# Altium PCB 2019_ESP01_Prog.PcbDoc
Units mil, origin at the board's own origin, x right, y up, seen from the top; angles counter-clockwise.
Board outline 990 x 1775 mil, 4 copper layers (1-TOP, 2-SIGNAL, 3-GND, 4-BOT), stack 68 mil thick; 35 components, 27 nets, 118 pads, 33 vias.
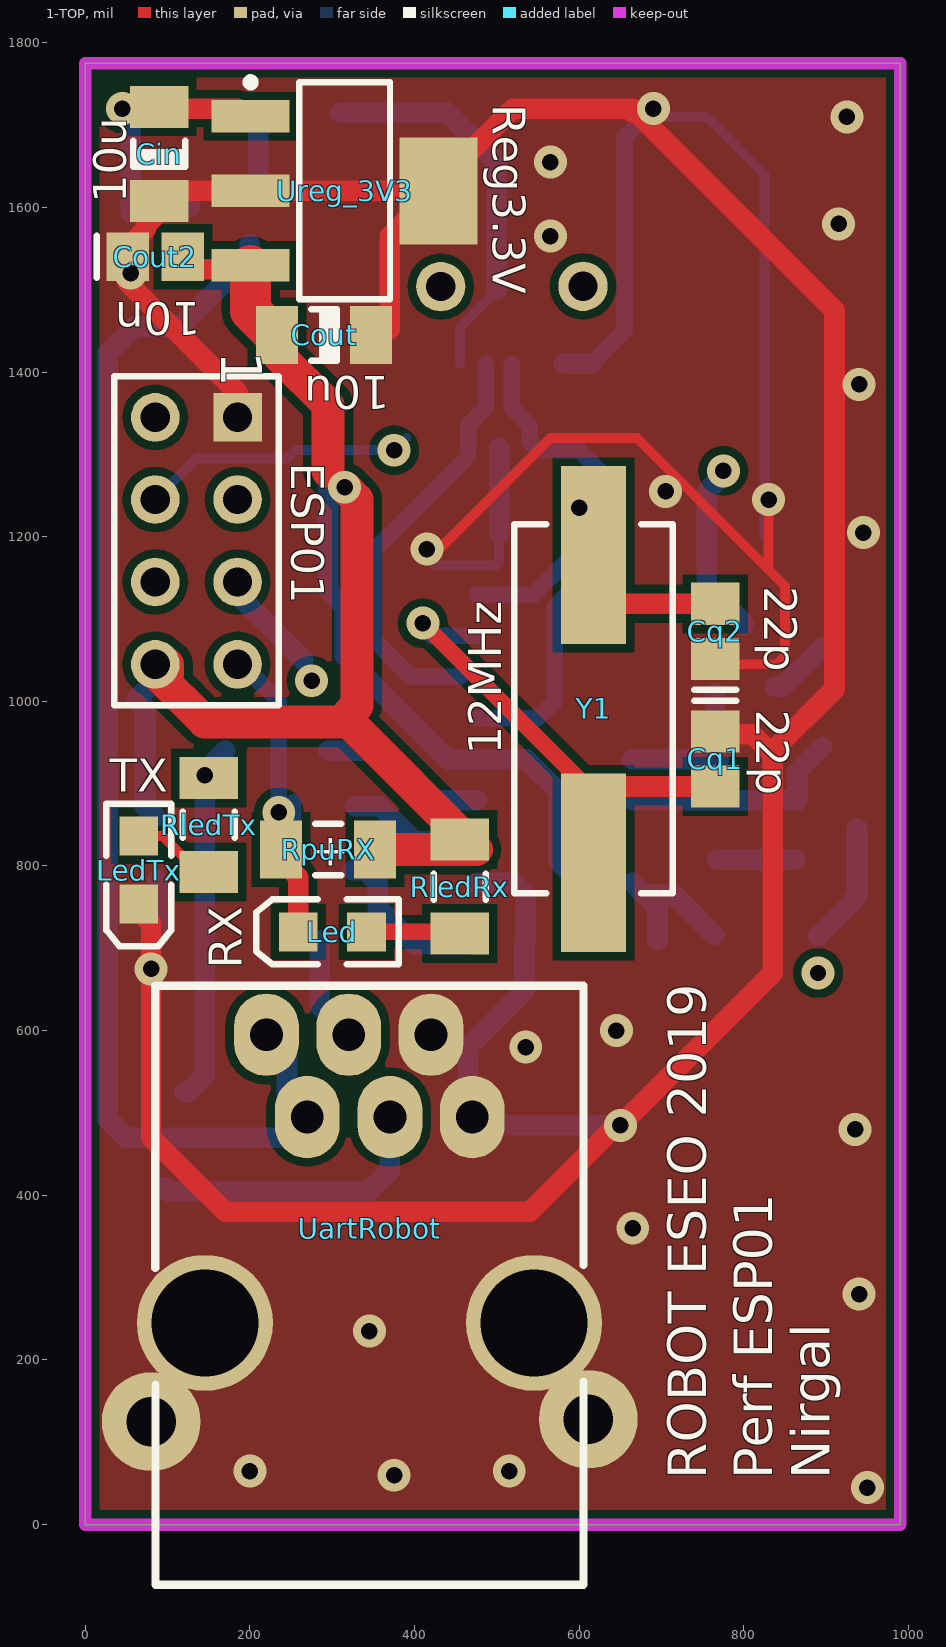
[diagram p0: 1-TOP view]
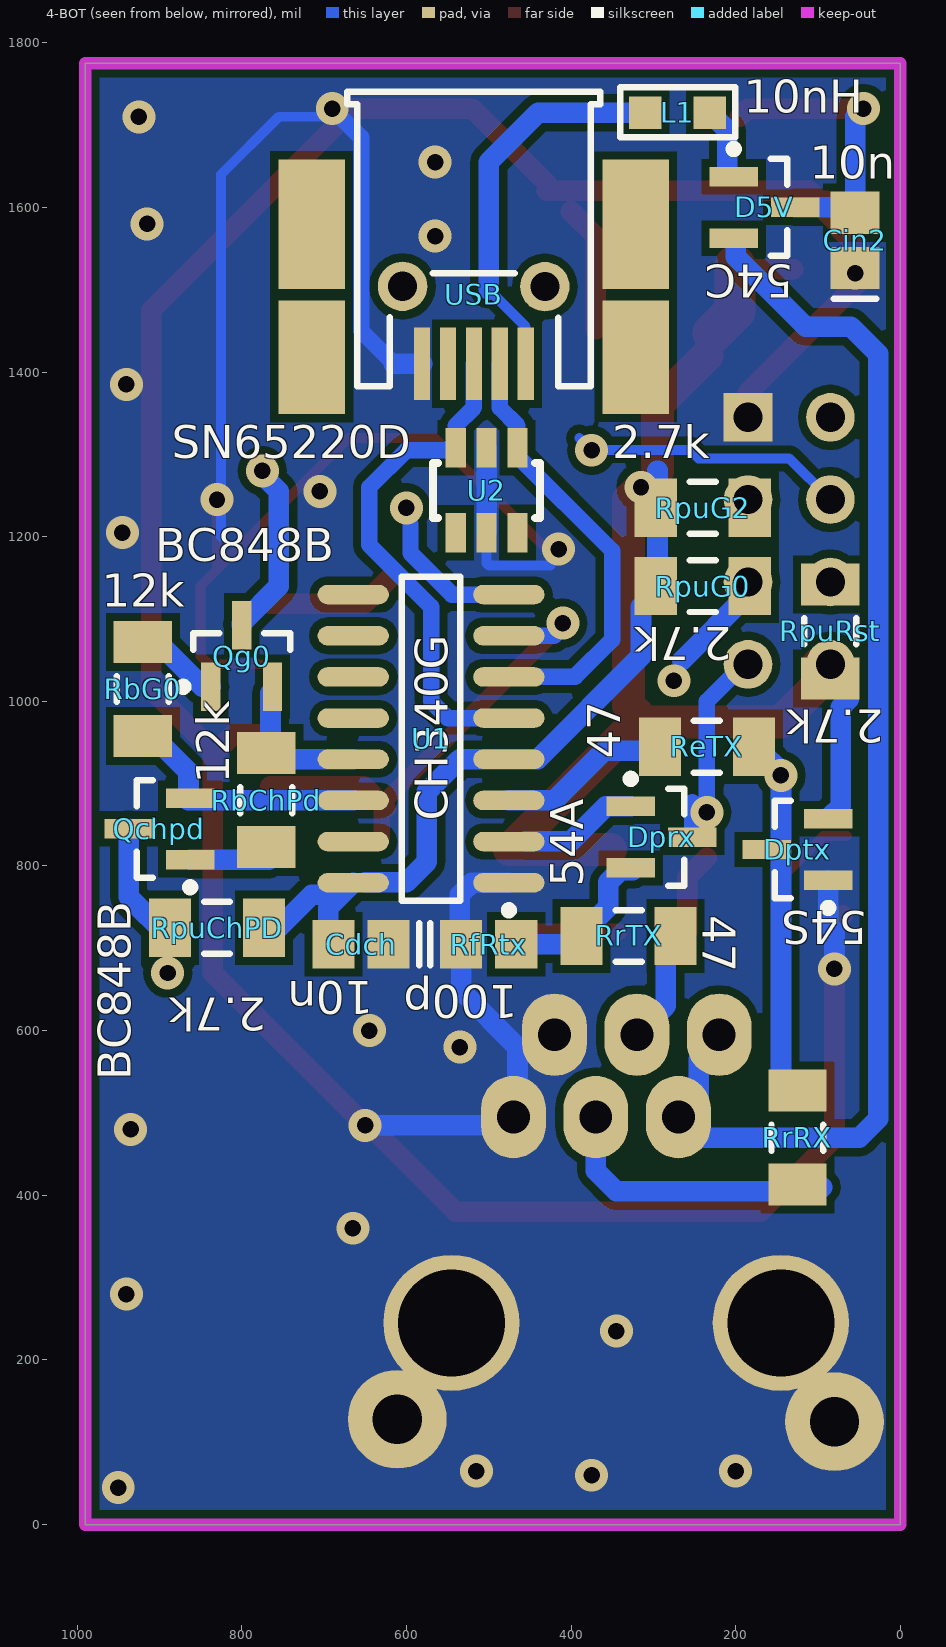
[diagram p1: 4-BOT view, seen from below]
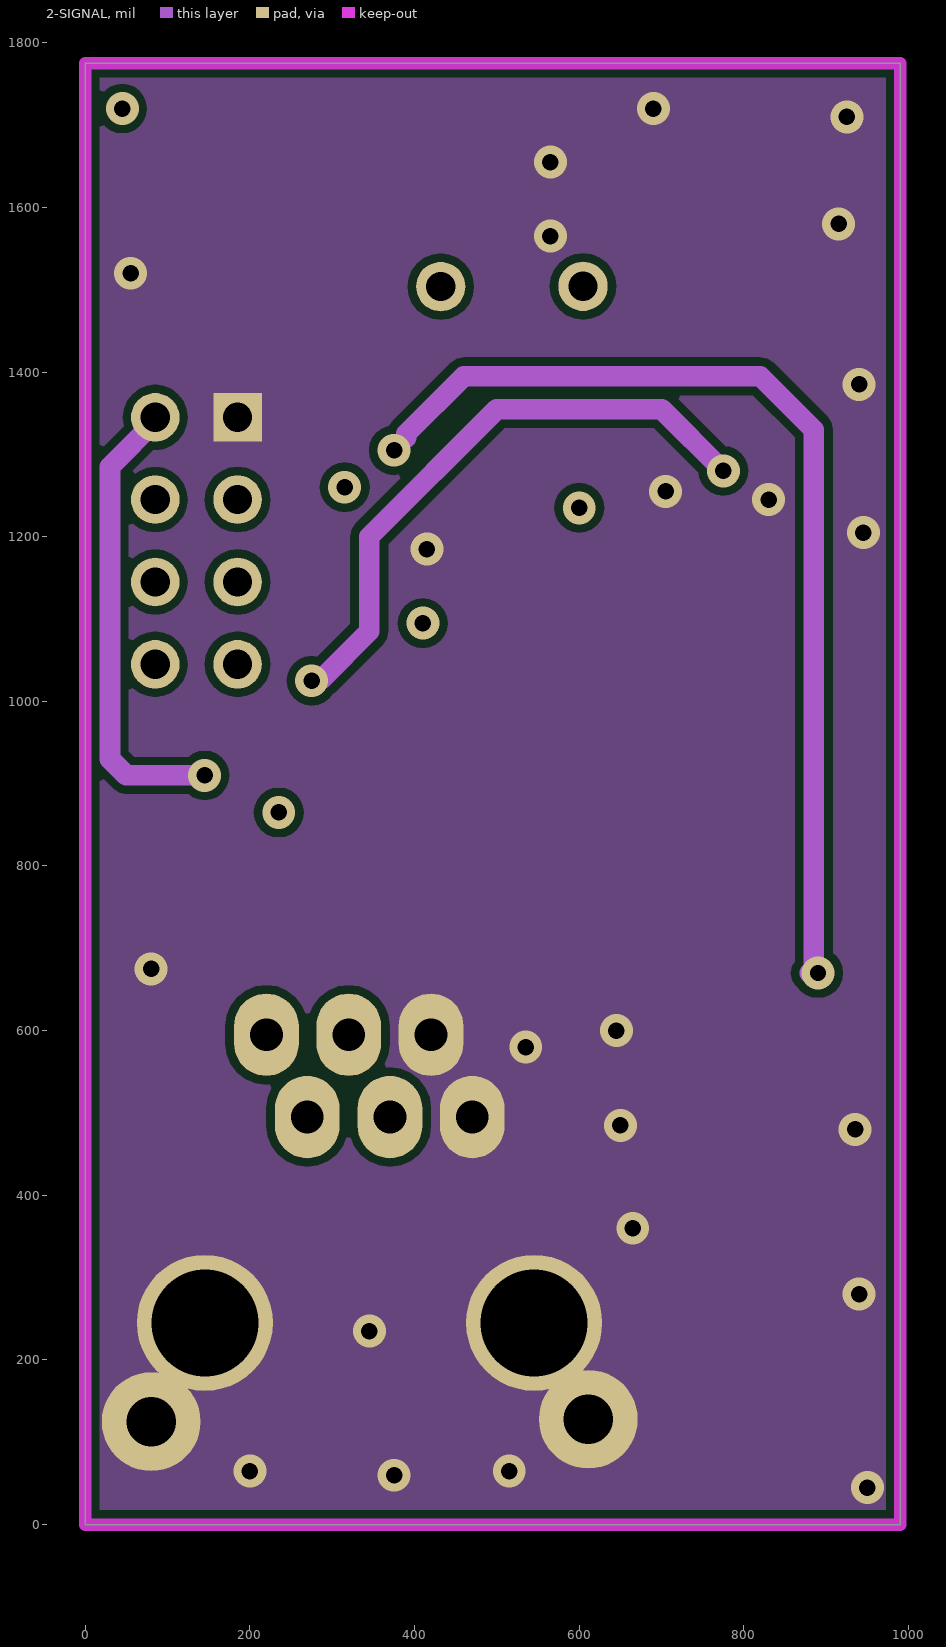
[diagram p2: 2-SIGNAL]
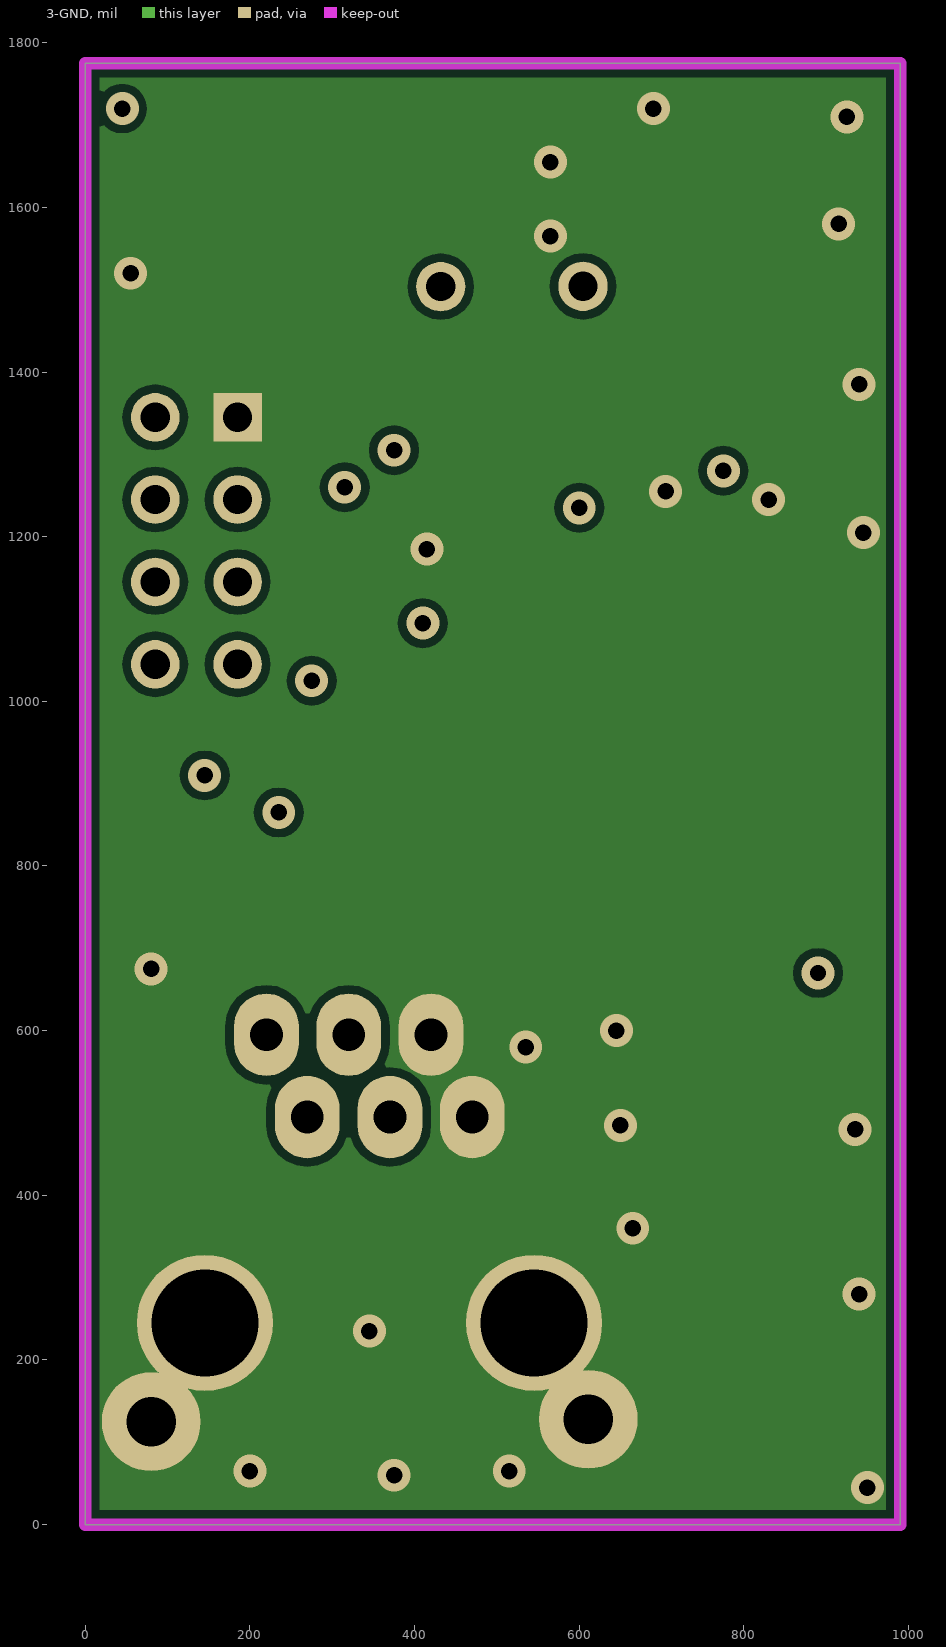
[diagram p3: 3-GND]
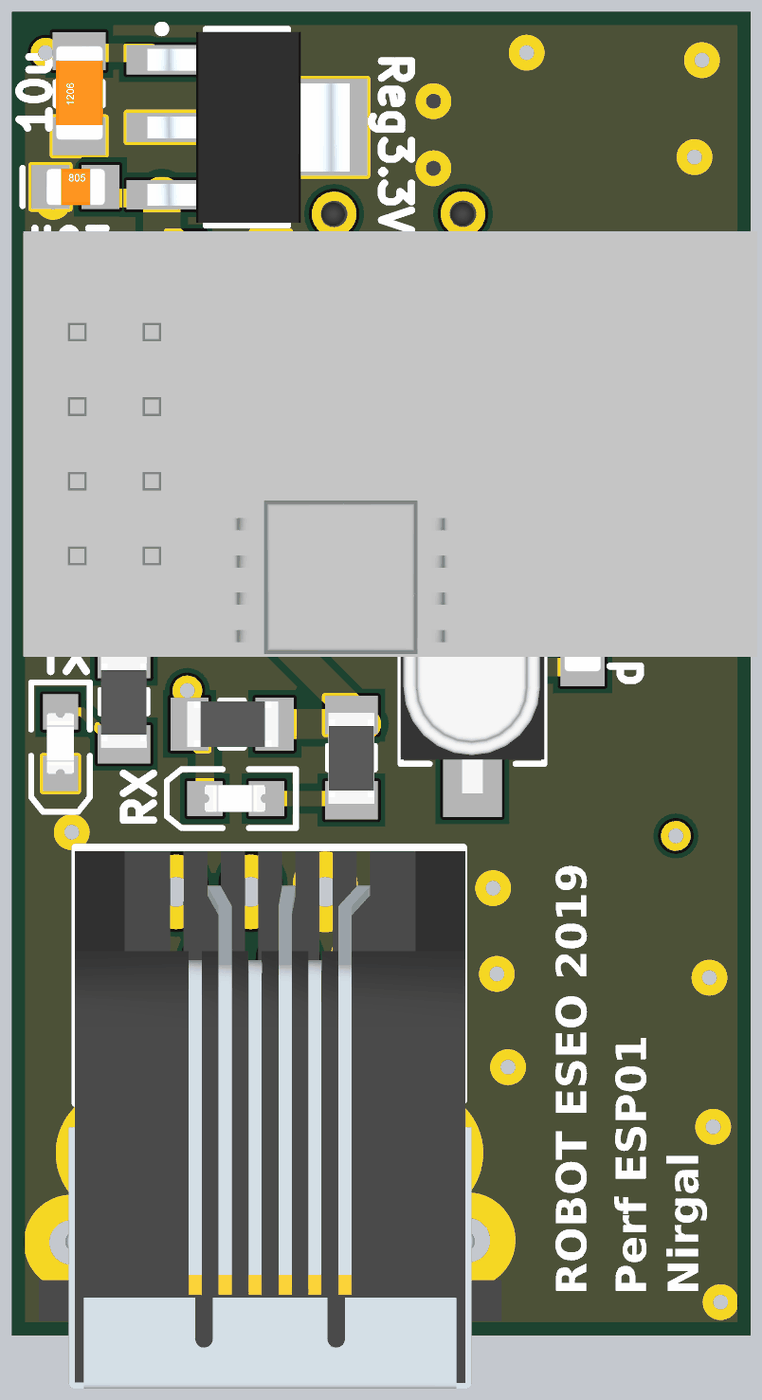
[diagram p4: 3D render of the assembled board from above, using the file's embedded part models]
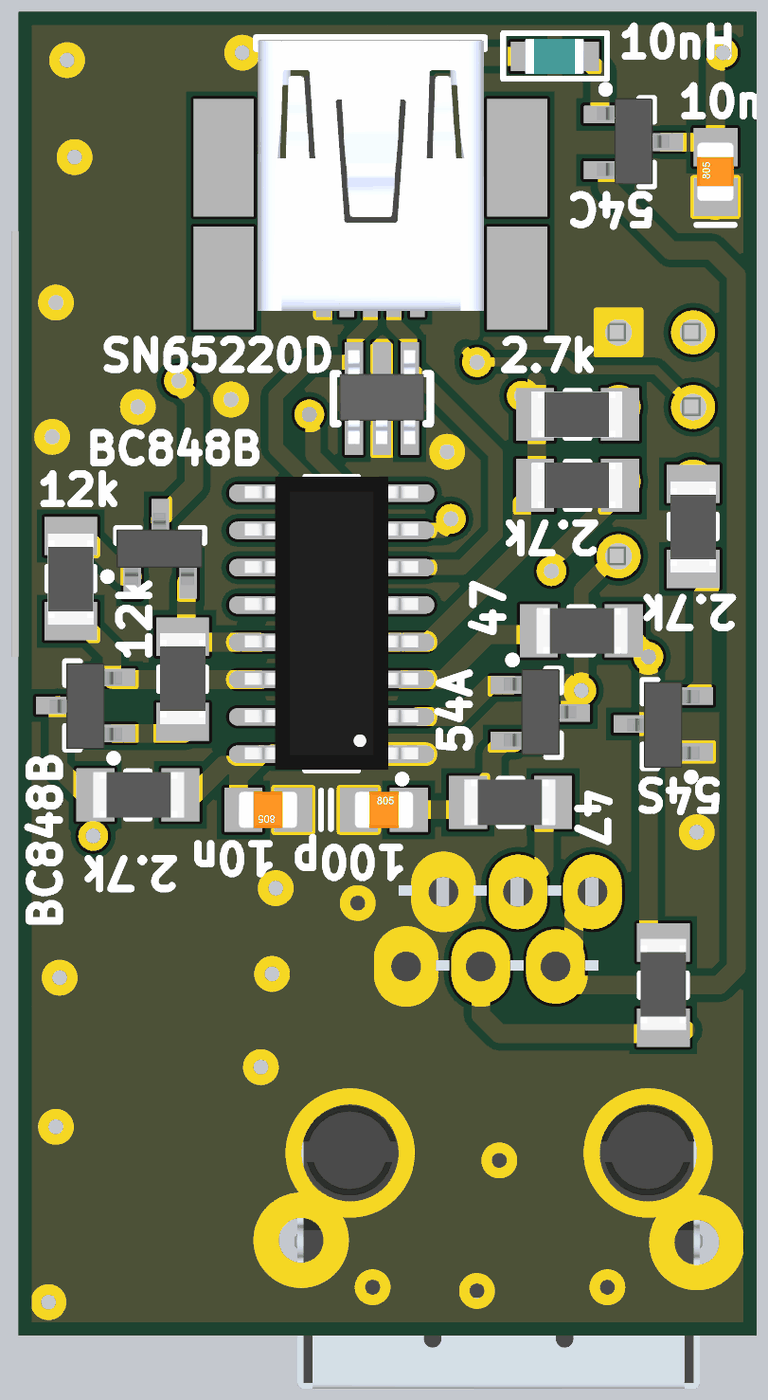
[diagram p5: 3D render of the assembled board from below, using the file's embedded part models]

## Layer stack, top to bottom
Top Solder: solder mask 0.4, Solder Resist, Dk 3.5
1-TOP: signal copper 1.4
Dielectric1: core 20.8, FR-4, Dk 4.8
2-SIGNAL: signal copper 1.4
Dielectric2: prepreg 20.8, FR-4, Dk 4.8
3-GND: signal copper 1.4
Dielectric3: core 20.8, FR-4, Dk 4.8
4-BOT: signal copper 1.4
Bottom Solder: solder mask 0.4, Solder Resist, Dk 3.5

## Board outline
0,0 0,1775 990,1775 990,0

## Design rules (kind name [scope] priority, off if disabled: settings)
Clearance Clearance_1 [InNamedPolygon('2-GND') Or  InNamedPolygon('3-GND') Or  InNamedPolygon('1-GND') Or  InNamedPolygon('4-GND')] p1: gap=10 ignorepadtopadclearanceinfootprint=FALSE except(0: Arc-Hole Track-Hole SMDPad-Hole THPad-Hole Via-Hole Fill-Hole Poly-Hole Region-Hole Text-Hole)
Clearance [All] p2: gap=7 ignorepadtopadclearanceinfootprint=FALSE except(0: Arc-Hole Track-Hole SMDPad-Hole THPad-Hole Via-Hole Fill-Hole Poly-Hole Region-Hole Text-Hole)
FabricationTestpoint [(IsPad And (OnTopLayer Or OnBottomLayer))] p1: side=3 testpointundercomponent=TRUE minsize=40 maxsize=100 preferedsize=60 minholesize=0 maxholesize=40 preferedholesize=32 testpointgrid=1 allowsidetop=TRUE allowsidebottom=TRUE usegrid=TRUE gridtolerance=0.01
HoleSize [All] p1: absolutevalues=TRUE maxlimit=200 minlimit=1 maxpercent=80.000 minpercent=20.000
PlaneConnect [All] p1: planeconnectstyle=Direct reliefexpansion=20 reliefentries=4 reliefconductorwidth=10 reliefairgap=10
PolygonConnect [All] p1: connectstyle=Direct reliefconductorwidth=10 reliefentries=4 polygonreliefangle="90 Angle" airgapwidth=10
RoomDefinition 2019_ESP01_Prog [InComponentClass('2019_ESP01_Prog')] p1: confinementstyle=ConfineIn formatcopy=TRUE lockcomponents=FALSE outline 2635,-960 2490,-960 2490,-755 2635,-755
RoutingVias [All] p1: holewidth=28 width=50 viastyle="Through Hole" minholewidth=28 minwidth=50 maxholewidth=28 maxwidth=50
SilkToSolderMaskClearance SilkscreenOverComponentPads [IsPad] p1: minsilkscreentomaskgap=10 clearancetoexposedcopper=TRUE
SolderMaskExpansion [All] p1: expansion=4
Width [All] p1: maxlimit=200 minlimit=10 preferedwidth=15
26 further rules are at their usual default settings.

## Components (designator, comment, footprint, x,y, rotation, side; value= is the part's Value field where it differs from the comment)
Cdch "10nF" C0805_N 655,705 r0 bottom
Cin "10uF" C1206_N 90,1665 r90 top
Cin2 "10nF" C0805_N 55,1560 r90 bottom
Cout "10uF" C1206_N 290,1445 r180 top
Cout2 "10nF" C0805_N 85,1540 r0 top
Cq1 "22pF" C0805_N 765,930 r270 top
Cq2 "22pF" C0805_N 765,1085 r90 top
D5V "BAT54C" SOT23-3N 165,1600 r180 bottom
Dprx "BAT54A" SOT23-3N 290,835 r180 bottom
Dptx "BAT54S" SOT23-3N 125,820 r0 bottom
ESP01 "BARRETTE_4 CONTACTS_2 RANGEES_FEMELLE_DROITE" ESP01 85,1345 r270 top
L1 "INDUCTANCE_PERLE_DE_FERRITE_0603" INDUCTANCE_CMS_0603 310,1715 r180 bottom
Led "Rx" LED_0805 300,720 r180 top
LedTx "Tx" LED_0805 65,795 r270 top
Qchpd "BC848B" SOT23-3N 900,845 r0 bottom
Qg0 "BC848B" SOT23-3N 800,1055 r90 bottom
RbChPd "12k" R1206_N 770,880 r90 bottom
RbG0 "12k" R1206_N 920,1015 r270 bottom
ReTX "47" R1206_N 235,945 r180 bottom
RfRtx "100pF" C0805_N 500,705 r180 bottom
RledRx "330" R1206_N 455,775 r270 top
RledTx "100" R1206_N 150,850 r270 top
RpuChPD "2.7k" R1206_N 830,725 r180 bottom
RpuG0 "2.7k" R1206_N 240,1140 r0 bottom
RpuG2 "2.7k" R1206_N 240,1235 r0 bottom
RpuRst "2.7k" R1206_N 85,1085 r270 bottom
RpuRX "10k" R1206_N 295,820 r0 top
RrRX "47" R1206_N 125,470 r90 bottom
RrTX "47" R1206_N 330,715 r0 bottom
U1 "CH340G" SO16_N 570,954.65 r0 bottom
U2 "SN65220D" SOT26_PAS=0.95_LARG=3_LONG=3 540,1205 r180 bottom
UartRobot "RJ11_6/6" "RJ11_6/6 - Wurth Half Shielded Tab Down WR-MJ" 420,595 r270 top
Ureg_3V3 "MCP1826S-3302E/DB" SOT223-4N 315,1620 r0 top
USB "USB_B_CMS" USB_MINI_B 455,1410 r0 bottom
Y1 "QUARTZ_CMS_HC49/4S" QUARTZ_CMS_HC49/4S 635,865 r90 top

## Footprints (in the part's own frame and the unit in brackets; to place one, negate y for a bottom-side part, rotate by r counter-clockwise, add the part's x,y. Pads: shape width x height; smd on the part's side, far side on the other; paste and mask are expansions set on the pad)
C0805_N [mm] "Chip Capacitor, Body 2.0x1.3mm, IPC Medium Density"
  rect 1.3x1.5 smd: 1(-0.85,0) 2(0.85,0)
  silkscreen extent -1.8,-0.65 -1.8,0.65, body extent -0.99,-0.63 1.01,0.62, height 0.8
C1206_N [mm] "Chip Capacitor, Body 3.2x1.6mm, IPC Medium Density"
  rect 1.3x1.8 smd: 1(-1.45,0) 2(1.45,0)
  silkscreen extent -0.4,-0.8 0.4,0.8, body extent -1.57,-0.81 1.63,0.79, height 1.02
ESP01 [mm]
  rect 1.5x1.5 hole 0.9: 1(0,2.54)
  round 1.5 hole 0.9: 2(0,0) 3(2.54,2.54) 4(2.54,0) 5(5.08,2.54) 6(5.08,0) 7(7.62,2.54) 8(7.62,0)
  silkscreen extent -1.27,-1.27 8.89,3.81, body extent -3.45,-1.78 11.05,23.22, height 9.65
INDUCTANCE_CMS_0603 [mm] "INDUCTANCE CMS 0603 ; DIMENSIONS : 1.6mm x 0.8mm"
  rect 1x1 smd: 1(0,0) 2(2,0)
  silkscreen extent -0.76,-0.76 2.78,0.79, body extent -0.01,-0.6 1.99,0.6, height 0.95
LED_0805 [mm] "SM LED; 2 Flat Leads"
  rect 1.2x1.2 smd: 1(-1.05,0) 2(1.05,0)
  silkscreen extent -2.05,-1 2.35,1, body extent -1.05,-0.64 1.06,0.64, height 1.2
QUARTZ_CMS_HC49/4S [mil] "QUARTZ CMS HC49 ;  DIMENSIONS : 11.4mm x 4.9mm ; ESPACEMENT BROCHES : 9.5mm"
  rect 216.53x78.73 smd: 1(-61.2,17.6) 2(312.8,17.6)
  silkscreen extent -98,-79 350,114, body extent -138,-79 390,114, height 200
R1206_N [mm] "Chip Resistor, Body 3.2x1.6mm, IPC Medium Density"
  rect 1.3x1.8 smd: 1(-1.45,0) 2(1.45,0)
  silkscreen extent -0.4,-0.8 0.4,0.8, body extent -1.68,-0.87 1.68,0.87, height 0.71
"RJ11_6/6 - Wurth Half Shielded Tab Down WR-MJ" [mil] "Connector; RJ11; 6P/6C; 615 006 143 421"
  oval 100x78.74 hole 40: 1(0,-200) 2(100,-150.39) 3(0,-100) 4(100,-50) 5(0,0) 6(100,50)
  round 165.35 hole 130: 5(350,125.2) 5(350,-274.8)
  round 120 hole 60: 5(467,191) 5(470,-340)
  silkscreen extent -59,-335 668,185, body extent -54,-384 666,236, height 510
SO16_N [mm] "16-Pin Small Outline Integrated Circuit 1.27 mm Pitch, IPC Medium Density"
  oval 2.2x0.6 smd: 1(-2.4,4.445) 2(-2.4,3.175) 3(-2.4,1.905) 4(-2.4,0.635) 5(-2.4,-0.635) 6(-2.4,-1.905) 7(-2.4,-3.175) 8(-2.4,-4.445) 9(2.4,-4.445) 10(2.4,-3.175) 11(2.4,-1.905) 12(2.4,-0.635) 13(2.4,0.635) 14(2.4,1.905) 15(2.4,3.175) 16(2.4,4.445)
  silkscreen extent -2.52,-5 0.9,5.42, body extent -2.95,-5 2.95,4.98, height 1.75
SOT23-3N [mm] "SOT23, 3-Leads, Body 2.9x1.3mm, Pitch 0.95mm, Lead Span 2.5mm, IPC Medium Density"
  rect 1.5x0.6 smd: 1(-0.95,0.95) 2(-0.95,-0.95) 3(0.95,0)
  silkscreen extent -1.07,-1.5 0.7,1.92, body extent -1.24,-1.5 1.23,1.5, height 1.1
SOT26_PAS=0.95_LARG=3_LONG=3 [mm] "Small Outline Transistor Plastic Package ; 8 Leads ; Body Width = 1.6 mm ; Pitch = 0.95 mm"
  rect 0.62x1.22 smd: 1(0,0) 2(0.95,0) 3(1.9,0) 4(1.9,2.62) 5(0.95,2.62) 6(0,2.62)
  silkscreen extent -0.7,0.45 2.6,2.15, body extent -0.5,-0.25 2.4,2.95, height 0.94
SOT223-4N [mm] "SOT223/SC73, 4-Leads, Body 6.5x3.5mm, Pitch 2.3mm, Lead Span 7mm, IPC Medium Density"
  rect 2.4x1 smd: 1(-2.9,2.3) 2(-2.9,0) 3(-2.9,-2.3)
  rect 2.4x3.3 smd: 4(2.9,0)
  silkscreen extent -3.02,-3.35 1.4,3.47, body extent -3.39,-3.35 3.5,3.35, height 1.8
USB_MINI_B [mm] "USB ; CMS ; TYPE B ; PAS = 0.8 mm"
  rect 0.5x2.25 smd: 1(0,0) 2(0.8,0) 3(1.6,0) 4(2.4,0) 5(3.2,0)
  rect 2.05x3.5 smd: 6(6.6,-0.2) 9(-3.4,-0.2)
  rect 2.05x4 smd: 7(6.6,-4.3) 8(-3.4,-4.3)
  round 1.524 hole 0.9: -(-0.59,-2.38) -(3.8,-2.39)
  silkscreen extent -2.3,-8.4 5.5,0.7, body extent -3.77,-8.28 6.93,0.92, height 0.6

## Part data
Cdch Cin Cin2 Cout Cout2 Cq1 Cq2: library part Capacitor, "Capacitor"
D5V: library part "Diode Shottky double BAT54C", "DIODE SCHOTTKY DOUBLE"
Dprx: library part "Diode Shottky double  BAT54A", "DIODE SCHOTTKY DOUBLE"
Dptx: library part "Diode Shottky double BAT54S", "DIODE SCHOTTKY DOUBLE"
ESP01: library part "BARRETTE_4 CONTACTS_2 RANGEES_FEMELLE_DROITEE", "BARRETTE 4 CONTACTS 2 RANGEES FEMELLE DROITE"
L1: "INDUCTANCE PERLE DE FERRITE_0603"
Led LedTx: library part LED, "Typical LED"
Qchpd Qg0: "NPN General-purpose Transistor"
RbChPd RbG0 ReTX RledRx RledTx RpuChPD RpuG0 RpuG2 RpuRst RpuRX RrRX RrTX: library part Resistor, "Resistor"
RfRtx: library part Condensateur, "Capacitor"
UartRobot: "Right Angle, Standard Profile, Offset Latch DECconnect, Flangeless PCB Jack"
Ureg_3V3: "1000 mA, Low Voltage, Low Quiescent Current LDO Regulator, 3-Pin SOT-223, Extended Temperature"
USB: "EMBASE USB CMS TYPE B"
Y1: "QUARTZ CMS HC49/4S"

## Via types
v1: diameter 40, hole 20, 1-TOP to 4-BOT, 33 vias

## Nets (pads, with @x,y where several pads share a name; then routed paths per layer and width w, separated by ;. In a path a pad name is that pad's centre, name@x,y a point inside that pad or via, vN(x,y) a via of type N, cw(c..) or ccw(c..) an arc to the next point about the centre after c; other vN are vias at no path point)
3V3: Cdch.2 Cout2.2 Cout.2 Dptx.2 ESP01.8 RledRx.1 RpuChPD.2 RpuG0.2 RpuG2.2 RpuRst.2 RpuRX.2 U1.4 U1.16 Ureg_3V3.3 | length 2304
  1-TOP w25: Cout2.2@130,1525 Ureg_3V3.3@180,1525
  1-TOP w40: ESP01.8@85,1035 145,975 320,975 475,820 RpuRX.2 ; ESP01.8@90,1045 100,1045 ESP01.8@100,1035 ; Cout.2@235,1420 295,1360 295,1280 ; v1(315,1260) 330,1245 330,995 320,985
  1-TOP w50: Ureg_3V3.3 200.83,1474.17 Cout.2@227.5,1447.5
  4-BOT w25: RpuRst.2@75,1015 62.5,1002.5 72.5,992.5 72.5,872.5 Dptx.2@85,860 ; 295,1280 295,1135 315,1115 315,1055 440.35,929.65 U1.4 535.35,929.65 575,890 575,805 600,780 U1.16@650,780 ; U1.16 679.13,765 ; Cdch.2@695,710 695,749.13 679.13,765 ; RpuChPD.2@763.96,716.04 715,765 679.13,765
5V: Cin2.2 Cin.2 D5V.3 Ureg_3V3.1 | length 352.4
  1-TOP w25: v1(45,1720) 185,1720 Ureg_3V3.1@195,1710
  4-BOT w25: v1(45,1720) 55,1710 Cin2.2 ; Cin2.2@60,1600 D5V.3
5VUART: D5V.2 UartRobot.1 UartRobot.2 | length 1509.6
  4-BOT w25: D5V.2@200,1555 200,1540 115,1455 60,1455 27,1422 27,493 50,470 245,470 245,565 UartRobot.1@230,580
5VUSB: D5V.1 L1.2 | length 78.8
  4-BOT w25: D5V.1@210,1645 210,1693.74 L1.2
CH340RX: ReTX.1 U1.3 | length 205.5
  4-BOT w25: ReTX.1@295,940 360,940 420.35,879.65 U1.3
CH340TX: Dprx.1 U1.2 | length 145.2
  4-BOT w25: Dprx.1 357.6,872.4 400,830 U1.2@455,830
CH_PD: ESP01.4 Qchpd.3 RpuChPD.1 | length 1704.1
  2-SIGNAL w25: 390,1320 390,1325 460,1395 820,1395 885,1330 885,675 v1@880,670
  4-BOT w12: ESP01.4 135,1295 245,1295 255.5,1305.5 374.5,1305.5 v1(375,1305) 390,1320
  4-BOT w25: RpuChPD.1@890,715 937.4,762.4 Qchpd.3
  other v1: 890,670
D+: U1.5 U2.6 USB.3 | length 625.9
  4-BOT w20: U1.5 549.65,979.65 570,1000 570,1115 645,1190 645,1260 600,1305 550,1305 540,1315 540,1335 517.99,1357.01 USB.3
D-: U1.6 U2.4 USB.2 | length 508.4
  4-BOT w20: U1.6@455,1030 395,1030 350,1075 350,1182.95 U2.4@465.2,1298.15 ; U2.4@465,1305 465,1335 486.5,1356.5 USB.2
DTR: Qg0.2 RbChPd.2 U1.13 | length 187.4
  4-BOT w25: U1.13 769.65,929.65 765,934.29 Qg0.2@765,1010
ESP_G1_TXD: Dptx.3 ESP01.2 ReTX.2 RledTx.1 RrRX.2 | length 1008.2
  2-SIGNAL w25: ESP01.2@87.5,1342.5 30,1285 30,930 50,910 v1@150,910
  4-BOT w20: ESP01.2@85,1340 ESP01.2
  4-BOT w25: RrRX.2@120,525 125,525 145,545 145,915 ReTX.2@170,940
  other v1: 145,910
ESP_G3_RXD: Dprx.3 ESP01.7 Led.2 RpuRX.1 | length 326.7
  1-TOP w25: RpuRX.1@235,810 258.66,786.34 Led.2
  4-BOT w20: ESP01.7@200,1035 235,1000 v1(235,865) ; Dprx.3 252.6,877.4
GND: Cdch.1 Cin2.1 Cin.1 Cout2.1 Cout.1 Cq1.1 Cq2.1 Dptx.1 ESP01.1 LedTx.2 RfRtx.1 U1.1 U2.2 U2.5 UartRobot.5 UartRobot.6 Ureg_3V3.2 Ureg_3V3.4 USB.5 | length 6200.3
  1-TOP w12: v1(415,1185) 430,1185 565,1320 670,1320 830,1160 ; Cq2.1@775,1045 840,1045 850,1055 850,1140 830,1160 ; v1(830,1245) 830,1160
  1-TOP w25: Cout2.1@50,1550 73.37,1573.37 73.37,1577.6 90,1594.23 Cin.1 ; Cout2.1 51.54,1508.46 185,1375 ESP01.1 ESP01.1@185,1340 ; LedTx.2@70,740 80,730 80,470 170,380 540,380 645,485 v1(650,485) 835,670 835,935 810,960 765,960 Cq1.1 ; Cin.1@100,1610 110,1620 Ureg_3V3.2 Ureg_3V3.4 ; Cout.1@370,1452.09 370,1565 Ureg_3V3.4@400,1595 ; Ureg_3V3.4@430,1630 520,1720 665,1720 ; 665,1715 670,1715 910,1475 910,1015 835,940
  4-BOT w12: 425,1165 500,1165 502.6,1167.6 U2.2 ; v1@690,1710 755,1710 825,1640 825,1200
  4-BOT w20: 615,1410 655,1450 655,1685 v1(690,1720)
  4-BOT w25: v1@80,680 80,720 87.6,727.6 Dptx.1 ; U1.1 520.35,779.65 535,765 RfRtx.1@535,710 ; U2.2 U2.5 ; RfRtx.1 533.46,648.46 465,580 465,500 UartRobot.6 480,485 v1(650,485) ; USB.5 615,1410
  other v1: 950,45 375,60 200,65 515,65 345,235 940,280 665,360 935,480 535,580 645,600 80,675 945,1205 705,1255 940,1385 55,1520 565,1565 915,1580 565,1655 925,1710
GPIO0: ESP01.5 Qg0.3 RpuG0.1 | length 1056.3
  2-SIGNAL w25: v1@287.5,1027.5 345,1085 345,1200 500,1355 700,1355 v1(775,1280)
  4-BOT w25: ESP01.5@185,1130 265,1050 ; v1(775,1280) 780,1280 755,1255 755,1140 800,1095 Qg0.3
  other v1: 275,1025
NetCq1_2: Cq1.2 U1.7 Y1.1 | length 557.3
  1-TOP w20: v1(410,1095) 630,875 Y1.1@630,835
  1-TOP w25: Y1.1@625,870 630,875 651.54,896.54 Cq1.2
  4-BOT w20: v1@420.35,1079.65 U1.7
NetCq2_2: Cq2.2 U1.8 Y1.2 | length 333.4
  1-TOP w25: Y1.2@620,1150 651.54,1118.46 Cq2.2
  4-BOT w20: U1.8 544.65,1129.65 595,1180 595,1215
  other v1: 600,1235
NetDprx_2: Dprx.2 RfRtx.2 RrTX.2 | length 196.4
  4-BOT w25: Dprx.2@325,795 340,795 355,780 355,750 400,705 RfRtx.2
NetESP01_6: ESP01.6 RpuRst.1
NetL1_1: L1.1 USB.1 | length 478.5
  4-BOT w12: USB.1 455,1455 500,1500
  4-BOT w25: L1.1 440,1715 500,1655 500,1500
NetLed_1: Led.1 RledRx.2 | length 113.7
  1-TOP w20: Led.1 RledRx.2@455,720
NetLedTx_1: LedTx.1 RledTx.2 | length 101.3
  1-TOP w12: LedTx.1 93.66,836.34 RledTx.2@145,785
NetQchpd_1: Qchpd.1 RbChPd.1 | length 95.2
  4-BOT w25: RbChPd.1@767.4,807.6 Qchpd.1
NetQg0_1: Qg0.1 RbG0.1 | length 77.2
  4-BOT w25: Qg0.1 847.6,1017.6 RbG0.1@895,1065
ROBOTRX: RrRX.1 UartRobot.4 | length 352.4
  4-BOT w25: RrRX.1@95,410 100,405 345,405 370,430 UartRobot.4
ROBOTTX: RrTX.1 UartRobot.3 | length 129.5
  4-BOT w25: RrTX.1@285,710 285,630 UartRobot.3
RTS: Qchpd.2 RbG0.2 U1.14 | length 278.1
  4-BOT w25: U1.14 864.65,879.65 864.65,914.65 RbG0.2@895,945
U1TXD: ESP01.3 RpuG2.1
pads on no net: U1.9 U1.10 U1.11 U1.12 U1.15 U2.1 U2.3 USB.4 USB.6 USB.7 USB.8 USB.9 USB.-

## Polygon pours and split planes (outlines as drawn)
GND on 1-TOP "1-GND" (solid, pour order 11): 5,1775 995,1775 995,5 5,5
GND on 2-SIGNAL "2-GND" (solid, pour order 10): 5,1775 990,1775 990,0 5,0
GND on 3-GND "3-GND" (solid, pour order 9): 0,1775 990,1775 990,10 0,10
GND on 4-BOT "4-GND" (solid, pour order 8): 0,1770 985,1770 985,5 0,5

## Keep-outs
Keep-Out Layer:
  the board outline again, w15

## Silkscreen, mask and mechanical layers (free items; w line width, h text height)
Top Overlay:
  text "Reg3.3V" at 495,1725 h40 r270
  text "10u" at 50,1605 h40 r90
  text "10n" at 140,1485 h40 r180
  text "10u" at 370,1395 h40 r180
  text "22p" at 825,1140 h40 r270
  text "22p" at 815,990 h40 r270
  text "12MHz" at 505,935 h40 r90
  text "TX" at 30,890 h40
  text "." at 150,850 h40
  text "+" at 275,800 h40
  text "RX" at 190,675 h40 r90
  text "ROBOT ESEO 2019" at 770,55 h80 r90
  text "Perf ESP01" at 850,55 h80 r90
  text "Nirgal" at 920,55 h80 r90
Bottom Overlay:
  text "10nH" at 190,1715 h40
  text "10n" at 110,1635 h40
  text "54C" at 130,1530 h40 r180
  text "2.7k" at 350,1295 h40
  text "SN65220D" at 885,1295 h40
  text "BC848B" at 905,1170 h40
  text "12k" at 970,1115 h40
  text "2.7k" at 205,1090 h40 r180
  text "2.7k" at 20,990 h40 r180
  text "47" at 340,930 h40 r270
  text "12k" at 815,900 h40 r270
  text "CH340G" at 550,855 h40 r270
  text "54A" at 385,775 h40 r270
  text "54S" at 40,745 h40 r180
  text "47" at 240,740 h40 r90
  text "10n" at 640,660 h40 r180
  text "100p" at 465,655 h40 r180
  text "2.7k" at 770,640 h40 r180
  text "BC848B" at 935,540 h40 r270

## Text inside footprints (layer, text, board x,y; h text height)
ESP01: Top Overlay "1" at 165,1425 h50 r270